# Altium PCB Copy of LCD_Board.PcbDoc
Units mil, origin at the board's own origin, x right, y up, seen from the top; angles counter-clockwise.
Board outline 6000 x 4000 mil, 2 copper layers (Top Layer, Bottom Layer); 41 components, 28 nets, 232 pads, 27 vias.
Unrouted connection lines stored in the file: 1.
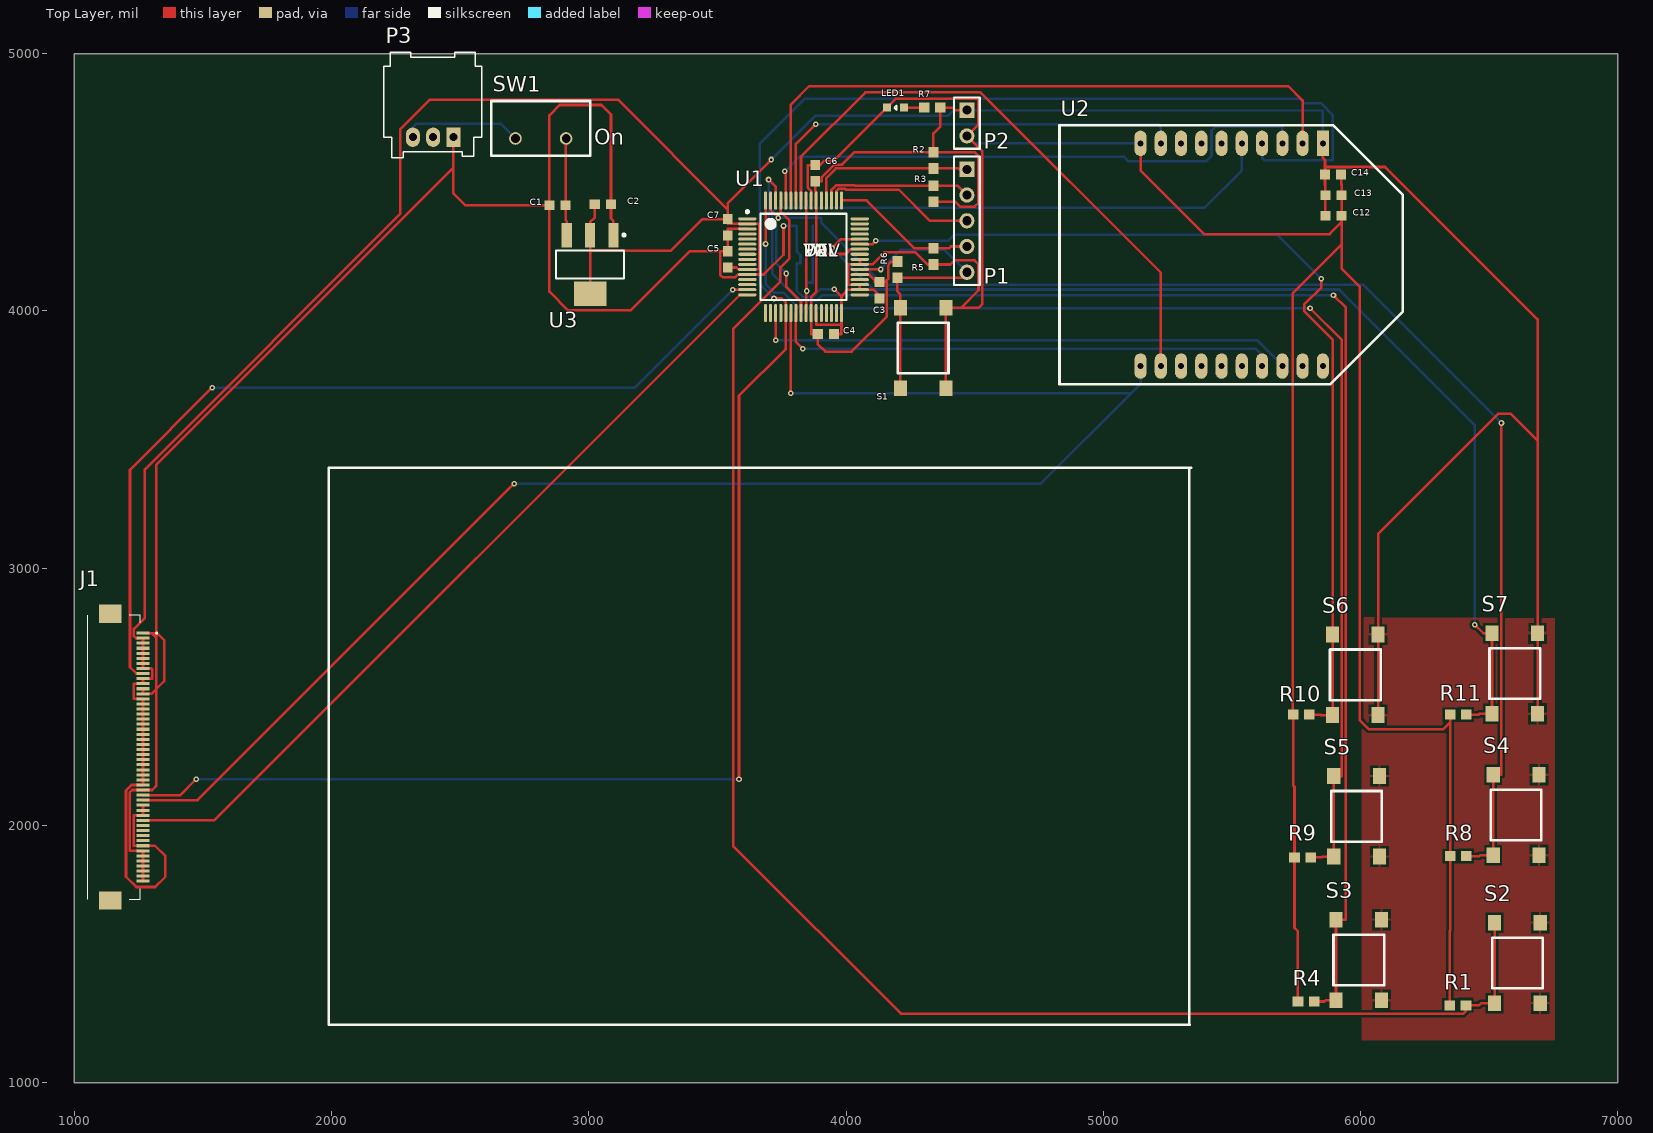
[diagram p0: Top Layer view]
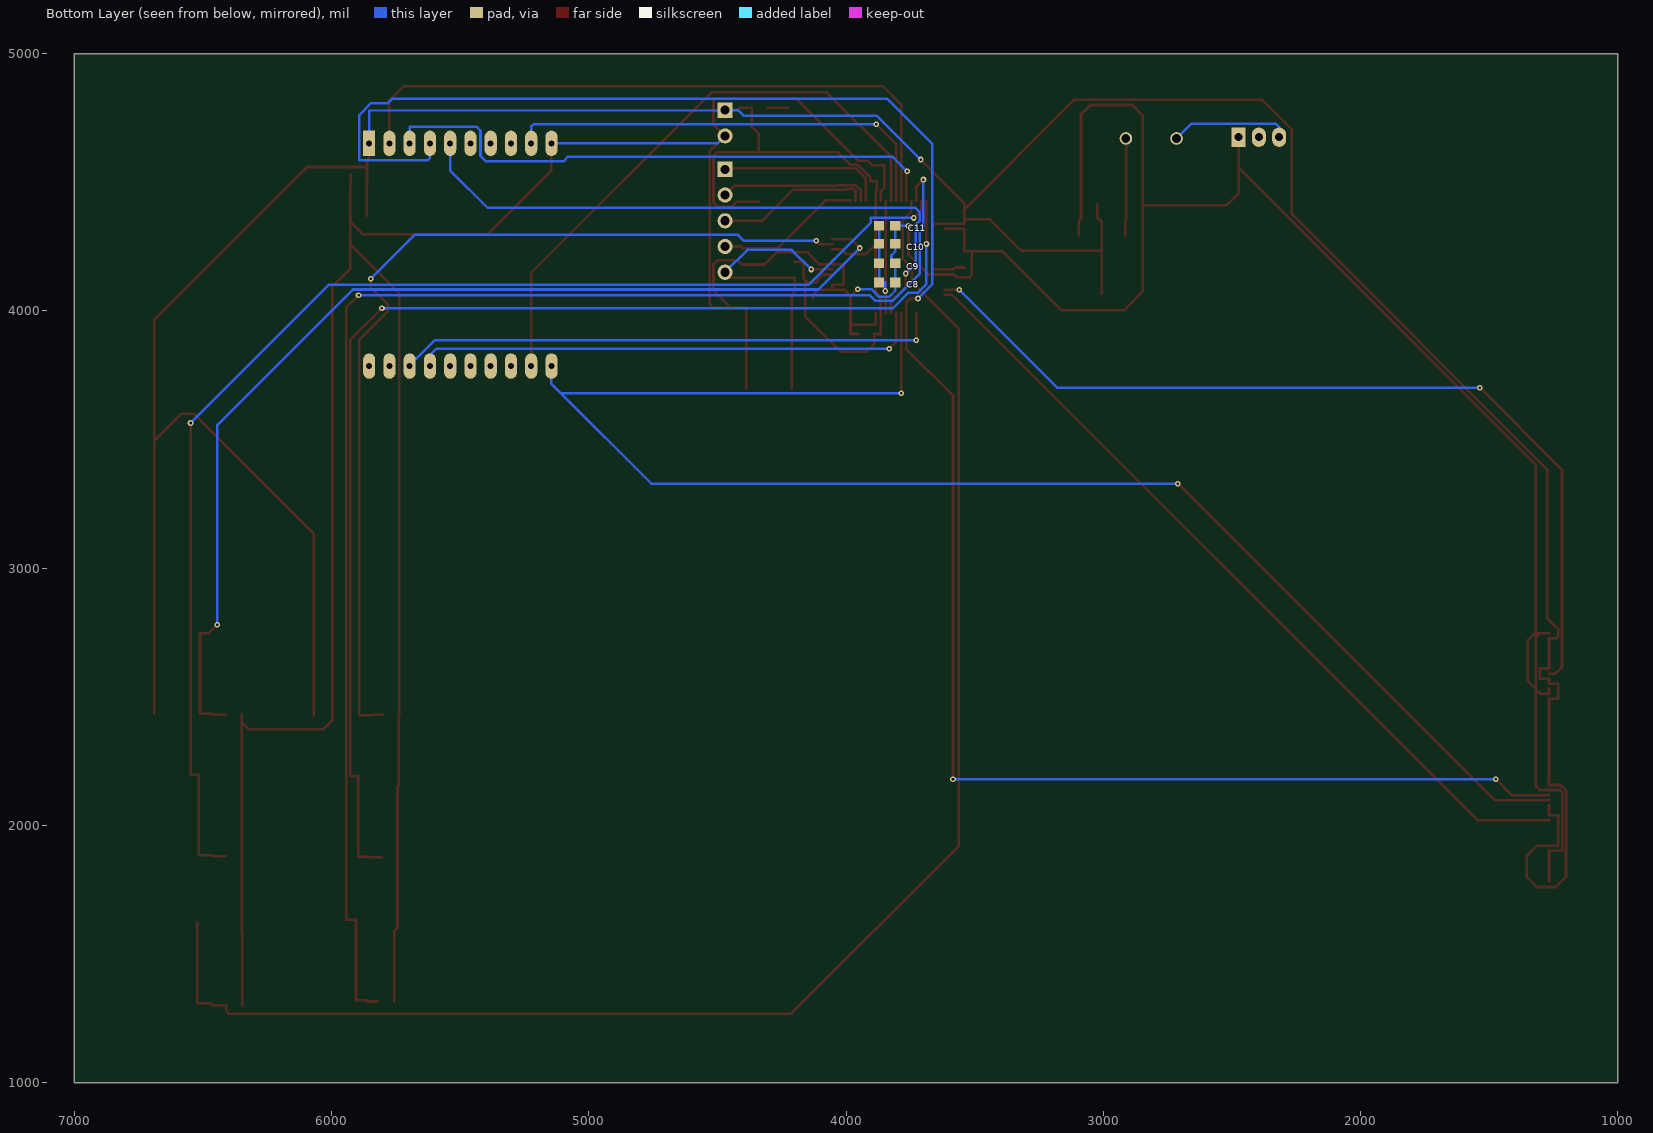
[diagram p1: Bottom Layer view, seen from below]

## Layer stack, top to bottom
Top Solder: solder mask 0.4, Solder Resist, Dk 3.5
Top Layer: signal copper 1.4
Dielectric 1: dielectric 12.6, FR-4, Dk 4.8
Bottom Layer: signal copper 1.4
Bottom Solder: solder mask 0.4, Solder Resist, Dk 3.5

## Board outline
1000,1000 7000,1000 7000,5000 1000,5000

## Design rules (kind name [scope] priority, off if disabled: settings)
Clearance [All] p1: gap=10 ignorepadtopadclearanceinfootprint=FALSE except(0: Arc-Hole Track-Hole SMDPad-Hole THPad-Hole Via-Hole Fill-Hole Poly-Hole Region-Hole Text-Hole; 5: Track-Track Track-SMDPad SMDPad-SMDPad; 7: Track-Via)
HoleSize [All] p1: absolutevalues=TRUE maxlimit=150 minlimit=10 maxpercent=80.000 minpercent=20.000
MinimumAnnularRing [All] p1: minimumring=7
MinimumSolderMaskSliver [All] p1: minsoldermaskwidth=1
PolygonConnect [All] p1: connectstyle=Relief reliefconductorwidth=10 reliefentries=4 polygonreliefangle="90 Angle" airgapwidth=10
RoutingVias [All] p1: holewidth=10 width=22 viastyle="Through Hole" minholewidth=10 minwidth=22 maxholewidth=100 maxwidth=150
SilkToSolderMaskClearance [IsPad] p1: minsilkscreentomaskgap=5 clearancetoexposedcopper=TRUE
SolderMaskExpansion [All] p1: expansion=4
Width [All] p1: maxlimit=150 minlimit=8 preferedwidth=10
27 further rules are at their usual default settings.

## Components (designator, comment, footprint, x,y, rotation, side; value= is the part's Value field where it differs from the comment)
C1 "Cap" CAPC0603 2878.5,4410 r180 top value=1uF
C2 "Cap" CAPC0603 3055,4415 r0 top value=1uF
C3 "Cap" CAPC0603 4130,4080 r270 top value=0.1uF
C4 "Cap" CAPC0603 3921.5,3910 r0 top value=0.1uF
C5 "Cap" CAPC0603 3540,4200 r90 top value=0.1uF
C6 "Cap" CAPC0603 3880,4535 r90 top value=0.1uF
C7 "Cap" CAPC0603 3540,4325 r270 top value=2.1uF
C8 "Cap" CAPC0603 3840,4110 r180 bottom value=0.1uF
C9 "Cap" CAPC0603 3840,4185 r180 bottom value=0.1uF
C10 "Cap" CAPC0603 3840,4260 r180 bottom value=1.0uF
C11 "Cap" CAPC0603 3840,4330 r180 bottom value=2.2uF
C12 "Cap" CAPC0603 5895,4370 r0 top value=10uF
C13 "Cap" CAPC0603 5895,4450 r0 top value=1uF
C14 "Cap" CAPC0603 5893.5,4530 r0 top value=47pF
J1 "XF3M-5015-1B" XF3M50151B 1155,2265 r270 top
LED1 "LED" LED0603 4192.48,4790 r180 top
P1 "Header 5" HDR1X5 4470,4550 r270 top
P2 "Header 2" HDR1X2 4470,4780 r270 top
P3 "3pos RA sherlock connector" MOLEX-HDR-1X3-SHERLOCK-RA 2473.74,4675 r0 top
R1 "Res" RES0603 6378.5,1300 r0 top value=10k
R2 "Res" RES0603 4340,4585 r270 top value=10k
R3 "Res" RES0603 4340,4455 r90 top value=10k
R4 "Res" RES0603 5788.5,1315 r0 top value=10k
R5 "Res" RES0603 4340,4211.5 r270 top value=10k
R6 "Res" RES0603 4200,4160 r270 top value=10k
R7 "Res" RES0603 4335,4790 r180 top value=10k
R8 "Res" RES0603 6380,1880 r0 top value=10k
R9 "Res" RES0603 5775,1875 r0 top value=10k
R10 "Res" RES0603 5770,2430 r0 top value=10k
R11 "Res" RES0603 6380,2430 r0 top value=10k
S1 "Button" PTS645xxxxSMTR92 4300,3855 r90 top
S2 "Button" PTS645xxxxSMTR92 6610,1465 r90 top
S3 "Button" PTS645xxxxSMTR92 5993.58,1476.5 r90 top
S4 "Button" PTS645xxxxSMTR92 6605,2040 r90 top
S5 "Button" PTS645xxxxSMTR92 5985,2035 r90 top
S6 "Button" PTS645xxxxSMTR92 5980,2585 r90 top
S7 "Button" PTS645xxxxSMTR92 6600,2590 r90 top
SW1 "360-2610-ND" AS11CP 50569.33,53575.51 r0 top
U1 "TM4C123GH6PMT7R" PM0064A_N 3835,4210 r0 top value=Value
U2 "XBee" XBee 5853.7,4651.14 r270 top
U3 "TLV1117LV33DCYR" SOT23-4N 3005,4180 r270 top

## Footprints (in the part's own frame and the unit in brackets; to place one, negate y for a bottom-side part, rotate by r counter-clockwise, add the part's x,y. Pads: shape width x height; smd on the part's side, far side on the other; paste and mask are expansions set on the pad)
AS11CP [mm] "SPST Slide Switch"
  round 1.25 hole 0.85: In(-1215.5,-1242.2) Out(-1210.5,-1242.2)
  silkscreen extent -1217.9,-1243.9 -1208.1,-1238.5, body extent -1218,-1243.8 -1208.2,-1238.42, height 12.9
CAPC0603 [mm] "Chip Capacitor, 2-Leads, Body 1.60x0.80mm, IPC Medium Density"
  rect 1x0.95 smd: 1(-0.8,0) 2(0.8,0)
  body extent -0.88,-0.48 0.87,0.48, height 0.8
HDR1X2 [mm] "Connector; Header; 2 Position"
  rect 1.5x1.5 hole 0.9: 1(0,0)
  round 1.5 hole 0.9: 2(2.54,0)
  silkscreen extent -1.27,-1.27 3.81,1.27
HDR1X5 [mm] "Connector; Header; 5 Position"
  rect 1.5x1.5 hole 0.9: 1(0,0)
  round 1.5 hole 0.9: 2(2.54,0) 3(5.08,0) 4(7.62,0) 5(10.16,0)
  silkscreen extent -1.27,-1.27 11.43,1.27
LED0603 [mm] "Chip LED, 2-Leads, Body 1.60x0.80mm, IPC Medium Density"
  rect 0.8x0.8 smd: A(-0.825,0) C(0.825,0)
  silkscreen extent -0.13,-0.25 0.12,0.25, body extent -0.88,-0.48 0.87,0.47, height 0.8
MOLEX-HDR-1X3-SHERLOCK-RA [mm]
  rect 1.397x1.905 hole 0.8: 1(0,0)
  oval 1.397x1.905 hole 0.8: 2(-2,0) 3(-4,0)
  silkscreen extent -6.86,-2.03 2.79,8.38, body extent -6.88,-1.99 2.82,8.51, height 5.75
PM0064A_N [mm]
  oval 1.8x0.3 smd paste-0.102 mask+0.051: 1(-5.55,3.75) 2(-5.55,3.25) 3(-5.55,2.75) 4(-5.55,2.25) 5(-5.55,1.75) 6(-5.55,1.25) 7(-5.55,0.75) 8(-5.55,0.25) 9(-5.55,-0.25) 10(-5.55,-0.75) 11(-5.55,-1.25) 12(-5.55,-1.75) 13(-5.55,-2.25) 14(-5.55,-2.75) 15(-5.55,-3.25) 16(-5.55,-3.75) 33(5.55,-3.75) 34(5.55,-3.25) 35(5.55,-2.75) 36(5.55,-2.25) 37(5.55,-1.75) 38(5.55,-1.25) 39(5.55,-0.75) 40(5.55,-0.25) 41(5.55,0.25) 42(5.55,0.75) 43(5.55,1.25) 44(5.55,1.75) 45(5.55,2.25) 46(5.55,2.75) 47(5.55,3.25) 48(5.55,3.75)
  oval 0.3x1.8 smd paste-0.102 mask+0.051: 17(-3.75,-5.55) 18(-3.25,-5.55) 19(-2.75,-5.55) 20(-2.25,-5.55) 21(-1.75,-5.55) 22(-1.25,-5.55) 23(-0.75,-5.55) 24(-0.25,-5.55) 25(0.25,-5.55) 26(0.75,-5.55) 27(1.25,-5.55) 28(1.75,-5.55) 29(2.25,-5.55) 30(2.75,-5.55) 31(3.25,-5.55) 32(3.75,-5.55) 49(3.75,5.55) 50(3.25,5.55) 51(2.75,5.55) 52(2.25,5.55) 53(1.75,5.55) 54(1.25,5.55) 55(0.75,5.55) 56(0.25,5.55) 57(-0.25,5.55) 58(-0.75,5.55) 59(-1.25,5.55) 60(-1.75,5.55) 61(-2.25,5.55) 62(-2.75,5.55) 63(-3.25,5.55) 64(-3.75,5.55)
  silkscreen extent -5.67,-4.25 4.25,4.57, body extent -4.19,-4.19 4.19,4.19, height 0.64
PTS645xxxxSMTR92 [mm] "PTS645 Series SMT 6 mm Tactile Switch"
  rect 1.555x1.3 smd: A(-3.975,2.25) A(3.975,2.25) B(-3.975,-2.25) B(3.975,-2.25)
  silkscreen extent -2.5,-2.5 2.5,2.5, body extent -3,-3 3,3, height 4.5
RES0603 [mm] "Chip Resistor, 2-Leads, Body 1.60x0.80mm, IPC Medium Density"
  rect 1.05x1 smd: 1(-0.8,0) 2(0.8,0)
  body extent -0.88,-0.48 0.87,0.47, height 0.8
SOT23-4N [mm] "SOT223, 4-Leads, Body 6.50x7.00mm (avg), Pitch 2.30mm, IPC Medium Density"
  rect 2.4x1 smd: 1(-2.9,2.3) 2(-2.9,0) 3(-2.9,-2.3)
  rect 2.4x3.2 smd: 4(2.9,0)
  silkscreen extent -3.02,-3.35 1.4,3.48, body extent -1.85,-3.35 1.85,3.35, height 1.7
XBee [mm]
  rect 2.5x1.2 hole 0.6: 1(0,0)
  oval 2.5x1.2 hole 0.6: 2(0,-2) 3(0,-4) 4(0,-6) 5(0,-8) 6(0,-10) 7(0,-12) 8(0,-14) 9(0,-16) 10(0,-18) 11(22,-18) 12(22,-16) 13(22,-14) 14(22,-12) 15(22,-10) 16(22,-8) 17(22,-6) 18(22,-4) 19(22,-2) 20(22,0)
  silkscreen extent -1.8,-26 23.8,7.9, body extent -1.9,-26 23.8,8, height 4.06
XF3M50151B [mm]
  rect 0.3x1.3 smd: 1(-12.25,2.85) 2(-11.75,2.85) 3(-11.25,2.85) 4(-10.75,2.85) 5(-10.25,2.85) 6(-9.75,2.85) 7(-9.25,2.85) 8(-8.75,2.85) 9(-8.25,2.85) 10(-7.75,2.85) 11(-7.25,2.85) 12(-6.75,2.85) 13(-6.25,2.85) 14(-5.75,2.85) 15(-5.25,2.85) 16(-4.75,2.85) 17(-4.25,2.85) 18(-3.75,2.85) 19(-3.25,2.85) 20(-2.75,2.85) 21(-2.25,2.85) 22(-1.75,2.85) 23(-1.25,2.85) 24(-0.75,2.85) 25(-0.25,2.85) 26(0.25,2.85) 27(0.75,2.85) 28(1.25,2.85) 29(1.75,2.85) 30(2.25,2.85) 31(2.75,2.85) 32(3.25,2.85) 33(3.75,2.85) 34(4.25,2.85) 35(4.75,2.85) 36(5.25,2.85) 37(5.75,2.85) 38(6.25,2.85) 39(6.75,2.85) 40(7.25,2.85) 41(7.75,2.85) 42(8.25,2.85) 43(8.75,2.85) 44(9.25,2.85) 45(9.75,2.85) 46(10.25,2.85) 47(10.75,2.85) 48(11.25,2.85) 49(11.75,2.85) 50(12.25,2.85)
  rect 1.8x2.2 smd: MP1(-14.15,-0.4) MP2(14.15,-0.4)
  silkscreen extent -14.05,-2.6 14.05,4.25, body extent -14.87,-2.6 14.87,3.47, height 3.23

## Part data
C1 C2: Manufacturer Part Number=C0603C105K8PACTU, Supplier Part Number 1=399-3118-1-ND, Supplier 1=Digi-Key
C3 C4 C5 C6 C7 C8 C9 C10 C11 C12 C13 C14: Supplier Part Number 1=1276-1000-1-ND, Supplier 1=Digi-Key
J1: "Connector", Manufacturer_Name="Omron Electronics", Mouser2 Part Number=653-XF3M-5015-1B, Datasheet Link=https://componentsearchengine.com/Datasheets/1/XF3M-5015-1B.pdf, Height=3.13mm, Manufacturer_Part_Number=XF3M-5015-1B, Mouser2 Price/Stock=https://www.mouser.com/Search/Refine.aspx?Keyword=653-XF3M-5015-1B
LED1: Color=Red, Supplier Part Number 1=754-1122-1-ND, Supplier 1=Digi-Key
P1: "Header, 5-Pin", LatestRevisionDate=17-Jul-2002, LatestRevisionNote="Re-released for DXP Platform.", Publisher="Altium Limited"
P2: "Header, 2-Pin", LatestRevisionDate=17-Jul-2002, LatestRevisionNote="Re-released for DXP Platform.", Publisher="Altium Limited"
P3: library part MOLEX-HDR-1x3-SHERLOCK_RA, "Header, Molex, 2mm Pitch Sherlock Header, Single Row, Right Angle 3 Circuits, Length 3.3mm", Manufacturer="Molex Connector Corporation", Manufacturer Part Number=35363-0360, Supplier Part Number 1=WM18932-ND, Supplier 1=Digi-Key
R1 R2 R3 R4 R5 R6 R7 R8 R9 R10 R11: Supplier Part Number 1=RMCF0603JT10K0CT-ND, Supplier 1=Digi-Key
S1 S2 S3 S4 S5 S6 S7: "SPST Button", Supplier Part Number 1=CKN9087CT-ND, Supplier 1=Digi-Key
SW1: library part "SPST Slide Switch", "SPST Slide Switch", Supplier 1=Digi-Key, Supplier Part Number 1=360-2610-ND
U1: "Imported", Alternate_PartNumber=TM4C123GH6PMT, Manufacturer="Texas Instruments", PartNumber=TM4C123GH6PMTR, CompType=IC, MountType=SMT, PackageReference=PM0064A, PIN_COUNT=64, RefDes=RefDes, RoHS=Y, TYPE=TYPE
U2: "XBee radio", Supplier Part Number 1=602-1181-ND, Supplier 1=Digi-Key
U3: "IC REG LINEAR 3.3V 1A SOT223-4", Digi-Key Part Number=296-28778-1-ND

## Via types
v1: diameter 22, hole 10, Top Layer to Bottom Layer, 27 vias

## Nets (pads, with @x,y where several pads share a name; then routed paths per layer and width w, separated by ;. In a path a pad name is that pad's centre, name@x,y a point inside that pad or via, vN(x,y) a via of type N, cw(c..) or ccw(c..) an arc to the next point about the centre after c; other vN are vias at no path point)
Button_0: R1.2 S2.A U1.61 | length 6186.3
  Top Layer w10: U1.61 3746.42,4384.24 3780,4350.66 3780,4203.48 3744.82,4168.3 3744.82,4113.82 3561,3930 3561,1920 4213,1268 6400,1268 6410,1278 R1.2 6461,1300 6469.5,1308.5 6521.42,1308.5 S2.A@6521.42,1621.5
Button_1: R4.2 S3.A U1.62 | length 5583.9
  Top Layer w10: v1(3699,4510.27) 3726.73,4482.54 U1.62 ; R4.2 5860,1315 5865,1320 5905,1320 5905,1632.99 5943,1632.99 5943,4012 v1(5895,4060)
  Bottom Layer w10: v1(3699,4510.27) 3699,4323 3714,4308 3714,4143.96 3818.96,4039 3886.21,4039 3907.21,4060 v1(5895,4060)
Button_2: R8.2 S4.A U1.63 | length 5049.9
  Top Layer w10: U1.63 3707.05,4390.95 v1(3737,4361) ; R8.2 6462,1880 6465.5,1883.5 6516.42,1883.5 6516.42,2196.5 6548,2196.5 v1(6548,3564)
  Bottom Layer w10: v1(3737,4361) 3903,4361 3903,4343.22 4145.59,4100.63 6011.37,4100.63 v1(6548,3564)
Button_3: R9.2 S5.A U1.64 | length 4786.1
  Top Layer w10: v1(3687.36,4260) U1.64 ; v1(5804,4010) 5928,3886 5928,2191.5 5896.42,2191.5 5896.42,1878.5 5852.5,1878.5 5849,1875 R9.2
  Bottom Layer w10: v1(3687.36,4260) 3687.36,4103.64 3720,4071 3756.96,4071 3817.96,4010 v1(5804,4010)
Button_4: R10.2 S6.A U1.43 | length 3741.9
  Top Layer w10: U1.43 4103.21,4259.21 v1(4116,4272) ; R10.2 5845,2430 5846.5,2428.5 5891.42,2428.5 5891.42,2741.5 5893,2741.5 5893,3887 5781,3999 5781,4024 5848,4091 v1(5848,4124)
  Bottom Layer w10: v1(4116,4272) 4396,4272 4419,4295 5677,4295 v1(5848,4124)
Button_5: R11.2 S7.A U1.44 | length 4176.6
  Top Layer w10: v1(3946,4244) 3980.9,4278.9 U1.44 ; R11.2 6459,2430 6462.5,2433.5 6511.42,2433.5 6511.42,2746.5 6477.5,2746.5 v1(6444,2780)
  Bottom Layer w10: v1(3946,4244) 4107,4083 5917,4083 6444,3556 v1(6444,2780)
CTS(L): U1.57 U2.12 | length 2326.1
  Top Layer w10: U1.57 3825.16,4599.16 4075,4849 4522.71,4849 5223.78,4147.93 U2.12
GND: C1.2 C2.2 C3.2 C4.2 C5.2 C6.2 C7.2 C8.2 C9.2 C10.2 C11.2 C12.2 C13.2 C14.2 J1.1 J1.12 J1.13 J1.32 J1.44 J1.45 J1.46 J1.47 J1.48 J1.49 J1.50 LED1.C P2.2 P3.1 R1.1 R4.1 R5.2 R8.1 R9.1 R10.1 R11.1 S1.B U1.3 U1.12 U1.27 U1.32 U1.34 U1.35 U1.39 U1.40 U1.55 U2.10 U3.1 | length 19858
  Top Layer w10: J1.50 J1.49 J1.48 J1.47 J1.46 J1.45 J1.44 1216,1900.83 1216,2128.67 1224.37,2137.05 J1.32 1303,2137.05 1317.8,2151.85 1317.8,2528.8 ; J1.12 J1.13 1300.06,2511.06 1317.8,2528.8 ; J1.1 1300.51,2747.28 ; P3.1 2473.74,4556.74 ; U3.1 3095.55,4350 3086.5,4359.06 C2.2 3086.5,4762.5 3049,4800 2887.01,4800 2847.01,4760 C1.2 ; U1.3 3540,4318.27 C7.2 C5.2 3511,4231.5 ; v1(3757,4330) 3757,4218 3680.1,4141.1 U1.12 3580.1,4141.1 3569,4130 3521,4130 3511,4140 3511,4231.5 ; U1.55 3864.53,4466 3851,4479.53 3851,4566.5 C6.2 3899.18,4566.5 3916.19,4583.5 3953.5,4583.5 LED1.C 4195,4825 4515,4825 4515,4725 P2.2 4530,4620 4530,4026.5 4515,4011.5 4446.5,4011.5 ; U1.27 3884.21,3946 3982.64,3946 ; C4.2 3982.64,3910 3982.64,3946 ; v1(3954,4084) 3982.64,4055.36 ; U1.40 U1.39 ; C3.2 4130,4059.05 4107,4082.05 U1.34 ; S1.B@4388.58,3698.5 4388.58,4011.5 4446.5,4011.5 ; U2.10 5145.04,4545 5392.04,4298 5880,4298 5926.5,4344.5 ; R4.1 5757.01,1588 5743.5,1601.5 R9.1 5743.5,2150 5738.5,2155 R10.1 5736,2430 5736,4066.53 5926.5,4257.03 ; C14.2 5925,4490.5 5926.5,4489 C13.2 C12.2 5926.5,4344.5 ; R1.1 6347.01,1589 6348.5,1590.5 R8.1 6348.5,2400 ; R11.1 6348.5,2400 ; 1300.51,2747.28 1317.8,2747.28 ; 1300.51,2747.28 1317.8,2730 ; 1317.8,2528.8 1349,2560 1349,2720 1321.72,2747.28 1317.8,2747.28 ; 1317.8,2528.8 1317.8,2730 ; 1317.8,2730 1317.8,2747.28 ; 1317.8,2747.28 1317.8,3400.8 2473.74,4556.74 ; 2473.74,4556.74 2473.74,4456.26 2520,4410 C1.2 ; C1.2 2847.01,4074.99 2920,4002 3162.5,4002 3392,4231.5 3511,4231.5 ; 3982.64,3946 U1.32 3982.64,4055.36 ; 3982.64,4055.36 4004.69,4082.05 U1.34 ; U1.34 U1.35 4008,4101.73 4008,4180.47 U1.39 ; U1.39 4103,4180.47 4149.53,4227 4270,4227 4317,4180 R5.2 4406,4180 4422,4196 4500,4196 4515,4181 4515,4080 4446.5,4011.5 ; 5926.5,4257.03 5926.5,4344.5 ; 5926.5,4257.03 5926.5,4164.5 5997,4094 5997,2409 6033,2373 6321.5,2373 6348.5,2400
  Bottom Layer w10: v1(3757,4330) C11.2 C10.2 3808.5,4230.2 3823.01,4215.69 3823.01,4185 C9.2 C8.2 3808.5,4078 3832.5,4054 3871.21,4054 3901.21,4084 v1(3954,4084) ; P2.2 4498.86,4651.14 U2.10
"LCD CS": J1.38 U1.16 | length 3195.7
  Top Layer w10: J1.38 1543.58,2018.94 3587,4062.36 U1.16
"LCD Reset": J1.9 U1.15 | length 3518
  Top Layer w10: J1.9 1241.2,2589.8 1216.61,2614.39 1216.61,3381.61 v1(1536,3701) ; v1(3560,4082.05) U1.15
  Bottom Layer w10: v1(1536,3701) 3178.95,3701 v1(3560,4082.05)
NetLED1_A: LED1.A R7.2 | length 78.5
  Top Layer w10: LED1.A R7.2
NetP3_3: P3.3 SW1.In | length 467.7
  Bottom Layer w10: P3.3 2316.26,4714.26 2330,4728 2657,4728 SW1.In
RST_N: P1.5 R6.2 S1.A U1.38 | length 1197.7
  Top Layer w10: U1.38 v1(4135,4160.79) ; S1.A@4211.42,3698.5 4211.42,4011.5 4211.42,4064 4200,4075.42 R6.2 4448.5,4128.5 P1.5
  Bottom Layer w10: v1(4135,4160.79) 4211.21,4237 4383,4237 P1.5
Sleep: U1.58 U2.9 | length 1738.6
  Top Layer w10: U1.58 3805.47,4648.47 v1(3882,4725)
  Bottom Layer w10: v1(3882,4725) 5214.78,4725 5223.78,4716 U2.9
"SPI CLK": U1.19 U2.18 | length 2133.2
  Top Layer w10: v1(3726.73,3886) U1.19
  Bottom Layer w10: v1(3726.73,3886) 5598,3886 5671,3813 5696.22,3813 U2.18
"SPI MISO": J1.33 U1.21 U2.4 | length 7786.9
  Top Layer w10: J1.33 1412.36,2117.36 v1(1474,2179) ; v1(3584,2179) 3584,3669.9 3766.1,3852 U1.21 3766.1,4031.9 3750,4048 v1(3720,4048)
  Bottom Layer w10: v1(1474,2179) v1(3584,2179) ; v1(3720,4048) 3664,4104 3664,4648 3841,4825 5763,4825 5781,4807 5846,4807 5893,4760 5893,4585 5627,4585 5617.48,4594.52 U2.4
"SPI MOSI": J1.34 U1.22 U2.11 | length 6251.9
  Top Layer w10: J1.34 1479.68,2097.68 v1(2710,3328) ; v1(3785.79,3680) U1.22
  Bottom Layer w10: v1(2710,3328) 4757.04,3328 5109.04,3680 ; v1(3785.79,3680) 5109.04,3680 ; U2.11 5145.04,3716 5109.04,3680
"SPI SS": U1.23 U2.17 | length 1988.3
  Top Layer w10: U1.23 3805.47,3879 v1(3831.47,3853)
  Bottom Layer w10: v1(3831.47,3853) 5592,3853 5617.48,3827.52 U2.17
TCK/SWCLK: P1.1 R2.2 U1.52 | length 650.9
  Top Layer w10: U1.52 3923.58,4516 3961.09,4553.5 R2.2 4436.97,4553.5 4440.47,4550 P1.1
TDI: P1.3 U1.50 | length 599.2
  Top Layer w10: U1.50 3962.95,4466 3970.89,4473.94 3996.06,4473.94 3999,4471 4205,4471 4326,4350 P1.3
TDO/SWO: P1.4 R5.1 U1.49 | length 567.8
  Top Layer w10: U1.49 3982.64,4429 4080,4429 4266.01,4242.99 R5.1 4401,4242.99 4408.01,4250 P1.4
TMS/SWDIO: P1.2 R3.2 U1.51 | length 592.2
  Top Layer w10: U1.51 3943.27,4470 3962.21,4488.94 4031.83,4488.94 4034.27,4486.5 R3.2 4433.5,4486.5 P1.2
"UART5 RX": U1.59 U2.2 | length 2581.6
  Top Layer w10: U1.59 3785.79,4801.79 3857,4873 5720,4873 5774.96,4818.04 U2.2
"UART5 TX": U1.60 U2.3 | length 2258.7
  Top Layer w10: v1(3762,4542) 3766.1,4537.9 U1.60
  Bottom Layer w10: v1(3762,4542) 3819,4599 5081,4599 5099,4581 5400,4581 5421,4602 5421,4700 5437,4716 5696.22,4716 U2.3
VDD: C2.1 C3.1 C4.1 C5.1 C6.1 C7.1 C12.1 C13.1 C14.1 J1.2 J1.3 J1.4 J1.5 J1.6 J1.7 J1.8 J1.10 J1.11 J1.14 J1.15 J1.16 J1.17 J1.18 J1.19 J1.20 J1.21 J1.22 J1.23 J1.24 J1.25 J1.26 J1.27 J1.28 J1.29 J1.30 J1.31 J1.35 J1.36 J1.37 J1.43 P2.1 R2.1 R3.1 R6.1 R7.1 S2.B S3.B S4.B S5.B S6.B S7.B U1.2 U1.11 U1.26 U1.37 U1.42 U1.54 U2.1 U3.2 U3.4 | length 17076.1
  Top Layer w10: J1.35 J1.36 J1.37 1231,2038.62 1231,1920.51 J1.43 1313.49,1920.51 1354,1880 1354,1800 1314,1760 1241,1760 1201,1800 1201,2135 1222.73,2156.73 J1.31 J1.30 J1.29 J1.28 J1.27 J1.26 J1.25 J1.24 J1.23 J1.22 J1.21 J1.20 J1.19 J1.18 J1.17 J1.16 J1.15 J1.14 1231,2491.38 1231,2550.43 J1.11 J1.10 1302.8,2570.12 1302.8,2606 1299.31,2609.49 J1.8 J1.7 J1.6 J1.5 J1.4 J1.3 J1.2 1239,2727.6 1231.61,2734.99 1231.61,2763.19 1274,2805.58 1274,3384 2267,4377 2267,4705 2383,4821 3113,4821 3540,4394 ; U3.4 3005,4233 ; C2.1 3023.5,4363.5 3005,4345 U3.2 3005,4233 ; C5.1 3574,4168.5 3581.72,4160.79 U1.11 3662,4160.79 3662,4337.95 U1.2 3540,4337.95 C7.1 ; v1(3710,4588) 3540,4418 3540,4394 ; U1.37 4089.9,4141.1 4111,4120 4111,4111.5 C3.1 4150,4111.5 ; U1.42 4017.97,4239.53 3999.25,4220.8 3923,4220.8 3884.21,4259.59 ; R6.1 4176.5,4191.5 4165,4180 4165,4126.5 4150,4111.5 ; R3.1 4425,4423.5 4443.5,4405 4500,4405 4515,4420 4515,4601.5 4500,4616.5 R2.1 ; P2.1 4423,4780 4413,4790 R7.1 4366.5,4716.5 4340,4690 R2.1 ; U2.1 5853.7,4594.31 5862.01,4586 5862.01,4559 ; C12.1 C13.1 5863.5,4489 5862.01,4490.5 C14.1 5862.01,4559 ; S6.B@6068.58,2428.5 6068.58,2741.5 6068.58,3132.58 6536,3600 6584,3600 6688.58,3495.42 ; S7.B@6688.58,2433.5 6688.58,2746.5 6688.58,3495.42 ; 3005,4233 3318,4233 3441.5,4356.5 C7.1 ; C7.1 3540,4394 ; 3884.21,4259.59 3884.21,4073.98 3864.53,4054.3 U1.26 3864.53,3910 C4.1 3890,3871 3920,3841 4022,3841 4159,3978 4159,4111.5 4150,4111.5 ; 3884.21,4259.59 U1.54 3884.21,4463 3880,4467.21 C6.1 3906,4503.5 3906,4520 3954.5,4568.5 3985,4568.5 4032.99,4616.5 R2.1 ; 5862.01,4559 6096,4559 6688.58,3966.42 6688.58,3495.42
  Bottom Layer w10: v1(3710,4588) 3880,4758 4397,4758 4419,4780 P2.1 5853.7,4777.3 U2.1
VDDC: C8.1 C9.1 C10.1 C11.1 U1.25 U1.56 | length 718
  Top Layer w10: U1.25 v1@3844.84,4080.16 ; U1.56 v1@3844.84,4080.16 ; v1(3848,4077) v1@3844.84,4080.16
  Bottom Layer w10: v1(3848,4077) 3848,4110 C8.1 C9.1 C10.1 C11.1
VIN: C1.1 SW1.Out U3.3 | length 378.4
  Top Layer w10: SW1.Out 2911.85,4645.39 2910,4643.54 C1.1 2910,4353.45 2914.45,4349 U3.3
"Zigbee Reset": U1.24 U2.5 | length 2435.5
  Top Layer w10: v1(3768,4145) 3768,4093.16 3825.16,4036 U1.24
  Bottom Layer w10: v1(3768,4145) 3729,4184 3729,4335 3714,4350 3714,4384 3730,4400 5392.74,4400 5538.74,4546 U2.5
pads on no net: J1.39 J1.40 J1.41 J1.42 J1.MP1 J1.MP2 P3.2 U1.1 U1.4 U1.5 U1.6 U1.7 U1.8 U1.9 U1.10 U1.13 U1.14 U1.17 U1.18 U1.20 U1.28 U1.29 U1.30 U1.31 U1.33 U1.36 U1.41 U1.45 U1.46 U1.47 U1.48 U1.53 U2.6 U2.7 U2.8 U2.13 U2.14 U2.15 U2.16 U2.19 U2.20

## Polygon pours and split planes (outlines as drawn)
VDD on Top Layer "Top Layer-VDD" (solid, pour order 0): 6010,2810 6005,2805 6005,1165 6755,1165 6755,1270 6755,2805
no net on Top Layer "Top Layer-No Net" (solid, pour order 2): 6755,1185
no net on Bottom Layer "Bottom Layer-No Net" (solid, pour order 8): 1865,4175

## Silkscreen, mask and mechanical layers (free items; w line width, h text height)
Top Overlay:
  lines w10: 1990,3390.35 1990,1225 5336.46,1225 ; 1995,3390 5341.46,3390 ; 5335,1225 5335,3390.35

## Text inside footprints (layer, text, board x,y; h text height)
SW1: Top Overlay "On" at 3022.09,4646.38 h60
U1: Top Overlay "TOL" at 3835,4210 h50; Top Overlay "VAL" at 3835,4210 h50; Top Overlay "PN" at 3835,4210 h50; Top Overlay "DEV" at 3835,4210 h50